# Altium PCB ERN_MainPowerV2.PcbDoc
Units mil, origin at the board's own origin, x right, y up, seen from the top; angles counter-clockwise.
Board outline 4800 x 4030 mil, 2 copper layers (Top Layer, Bottom Layer); 68 components, 43 nets, 190 pads, 31 vias.
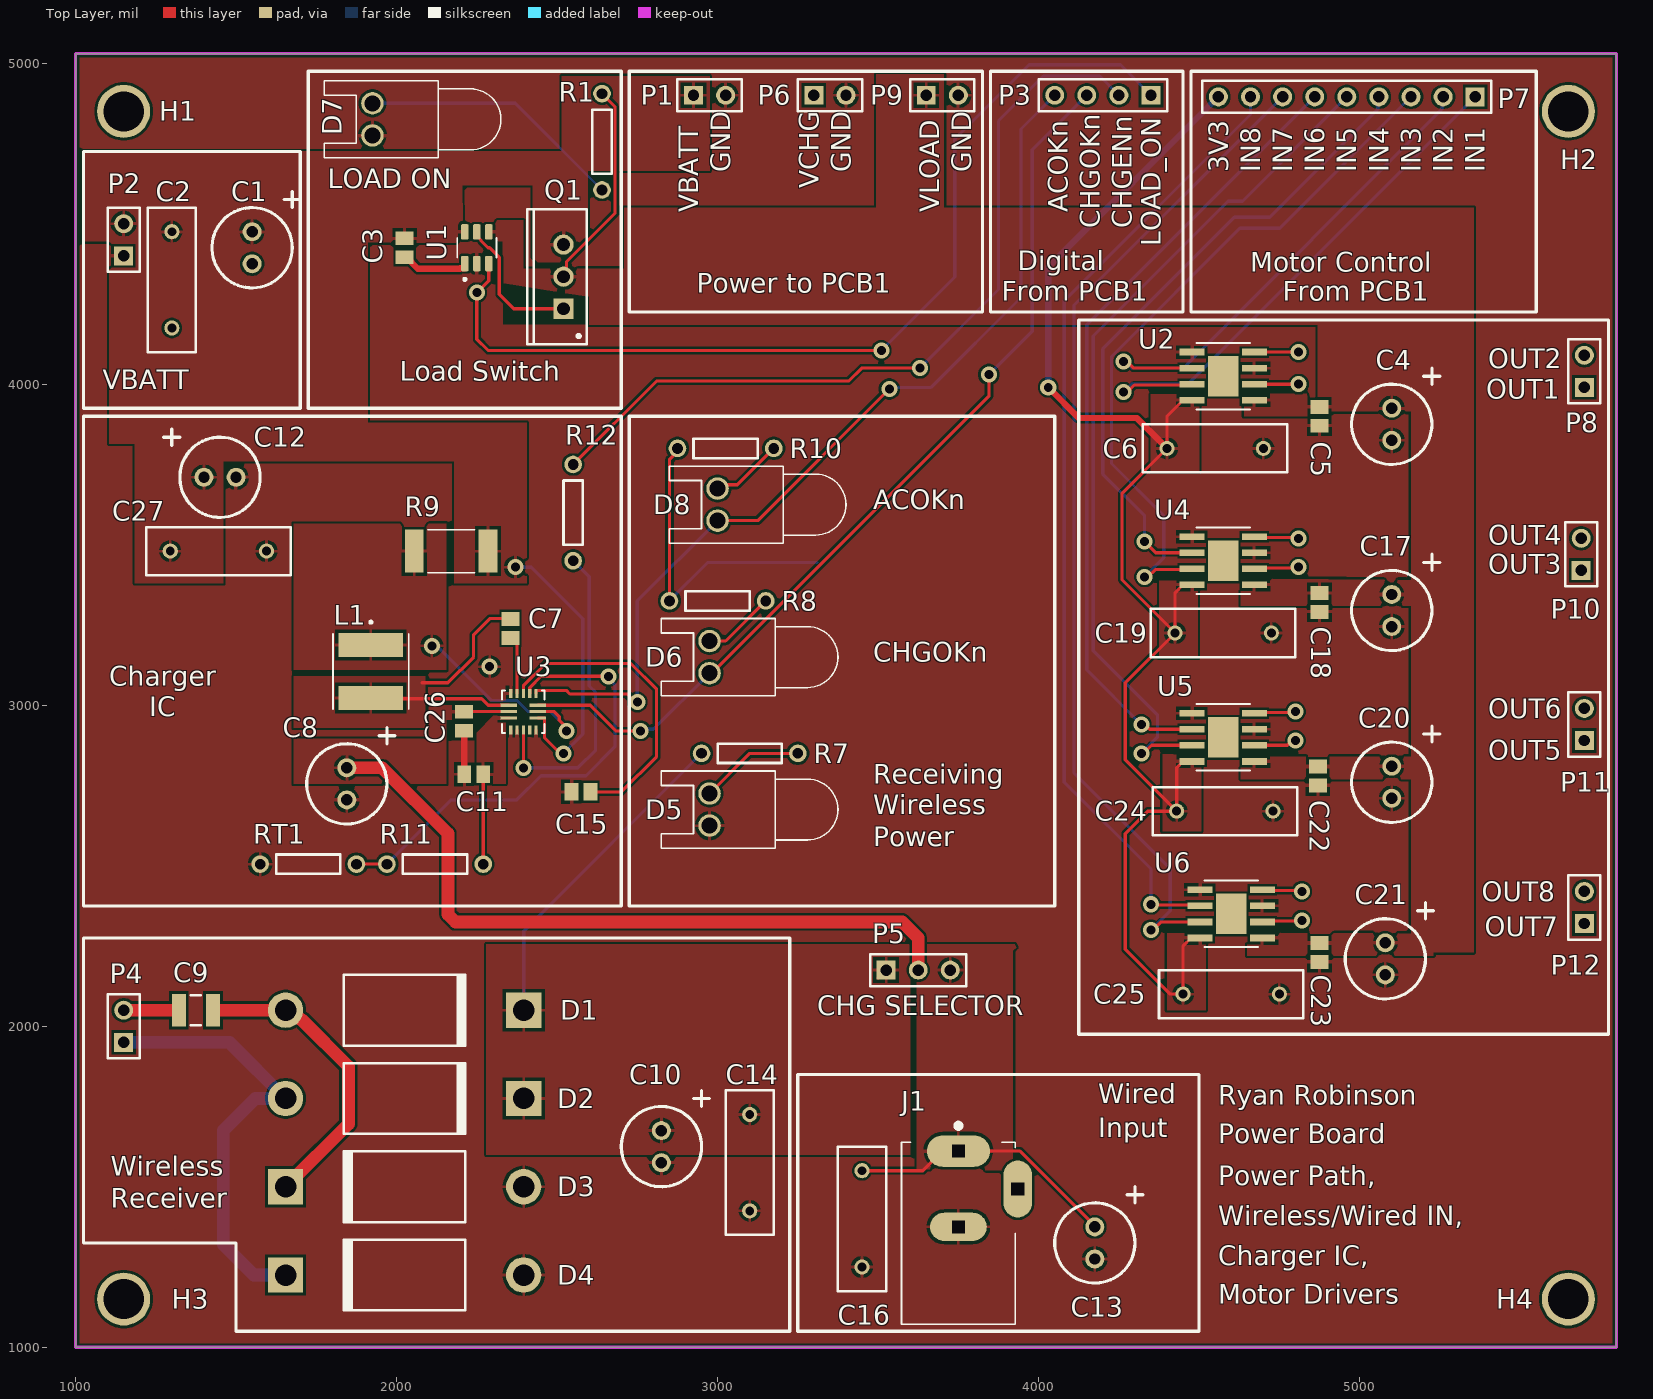
[diagram p0: Top Layer view]
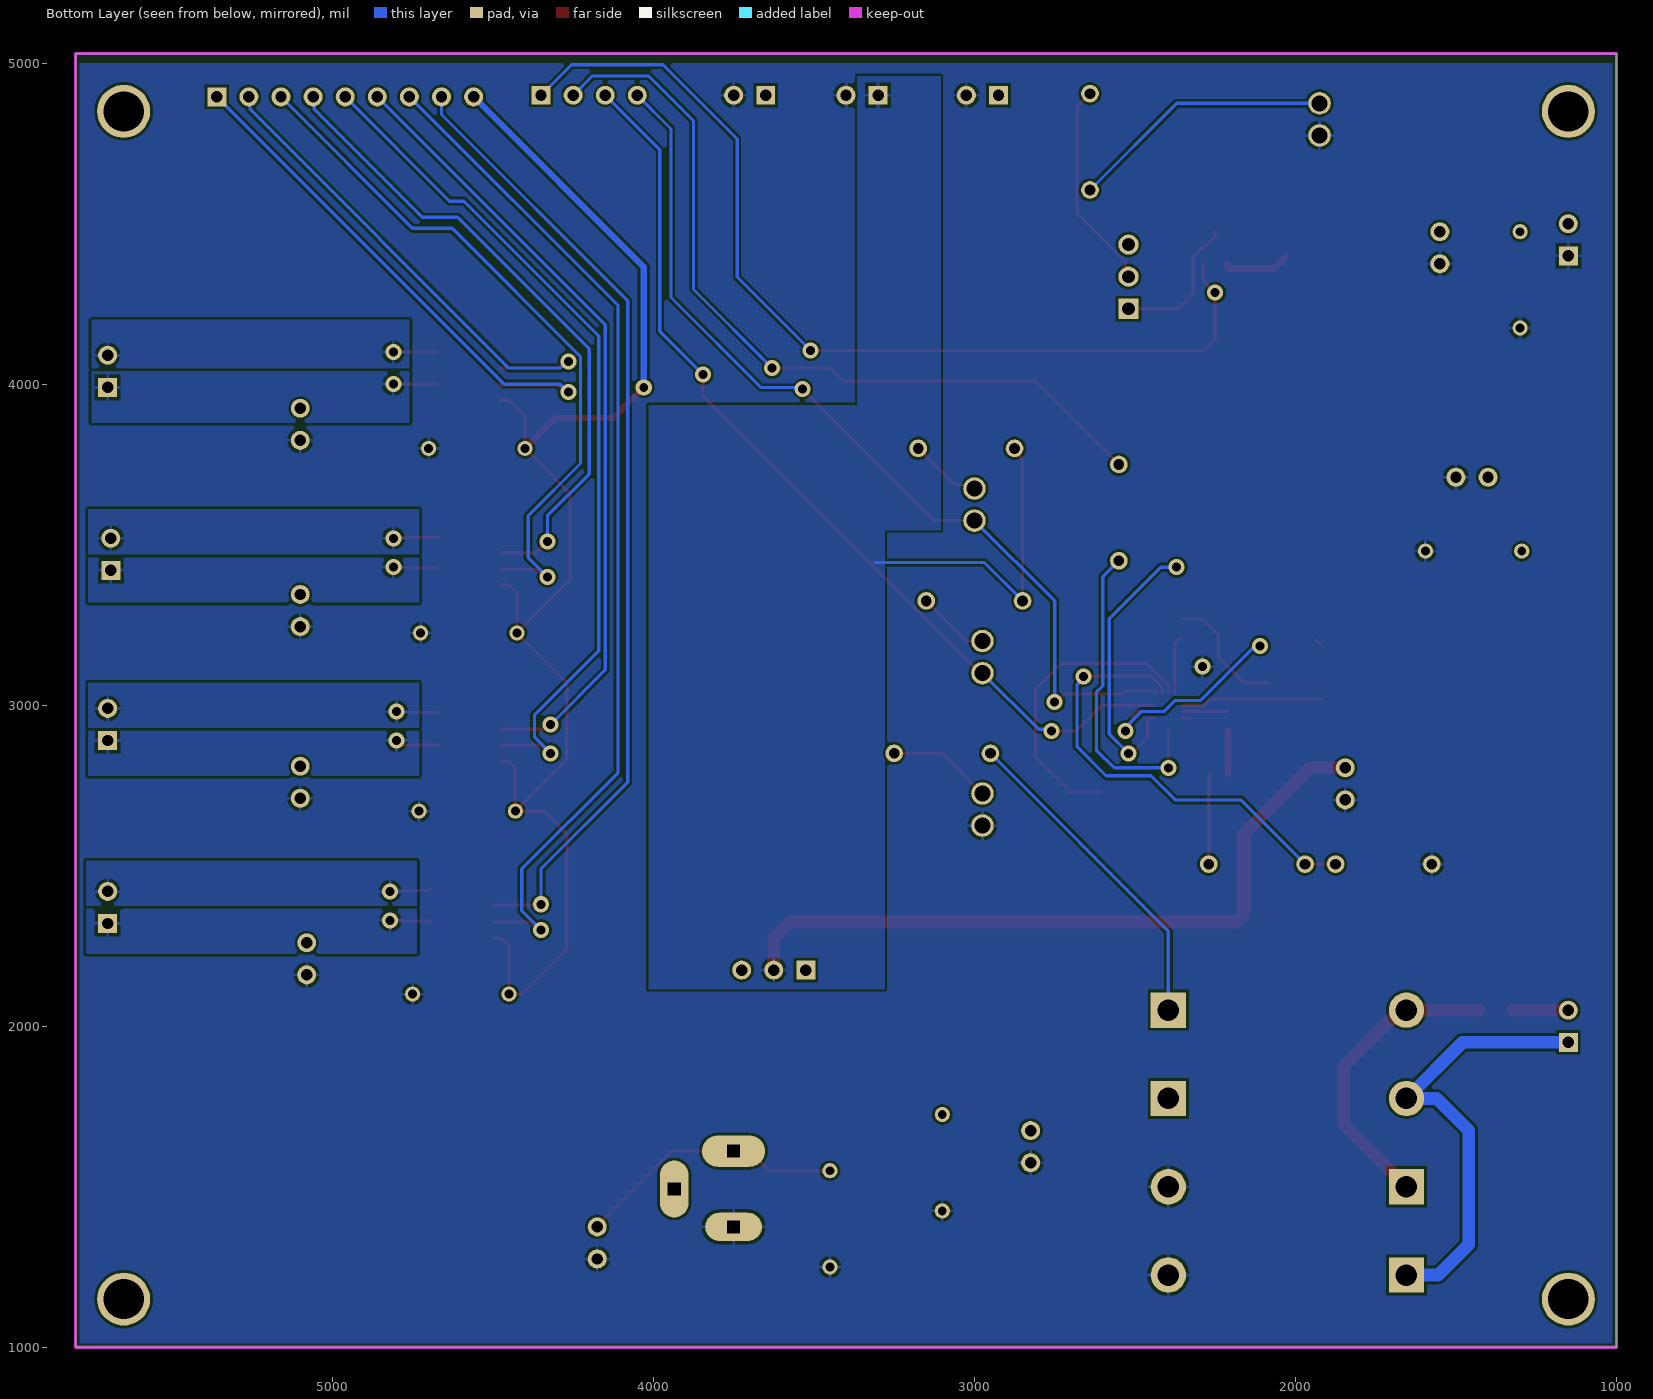
[diagram p1: Bottom Layer view, seen from below]

## Layer stack, top to bottom
Top Solder: solder mask 0.4, Solder Resist, Dk 3.5
Top Layer: signal copper 1.4
Dielectric 1: dielectric 12.6, FR-4, Dk 4.8
Bottom Layer: signal copper 1.4
Bottom Solder: solder mask 0.4, Solder Resist, Dk 3.5

## Board outline
1000,1000 1000,5030 5800,5030 5800,1000

## Design rules (kind name [scope] priority, off if disabled: settings)
Clearance [All] p1: gap=8 ignorepadtopadclearanceinfootprint=FALSE
MinimumSolderMaskSliver [All] p1: minsoldermaskwidth=4
PolygonConnect [All] p1: connectstyle=Relief reliefconductorwidth=10 reliefentries=4 polygonreliefangle="90 Angle" airgapwidth=10
RoutingVias [All] p1: holewidth=28 width=50 viastyle="Through Hole" minholewidth=28 minwidth=50 maxholewidth=28 maxwidth=50
SolderMaskExpansion [All] p1: expansion=4 istentingtop=FALSE
SupplyNets "Schematic Supply Nets_3" [InNet('+3V3')] p1: voltage=0.000
SupplyNets "Schematic Supply Nets_2" [InNet('VLOAD')] p2: voltage=0.000
SupplyNets "Schematic Supply Nets_1" [InNet('GND')] p3: voltage=0.000
SupplyNets "Schematic Supply Nets" [InNet('VBATT')] p4: voltage=0.000
Width [All] p1: maxlimit=40 minlimit=10 preferedwidth=10
29 further rules are at their usual default settings.

## Classes and differential pairs
component class ERN_MainPowerV2_2: C7 C8 C9 C10 C11 C12 C13 C14 C15 C16 C26 C27 D1 D2 D3 D4 D5 D6 D8 J1 L1 P4 P5 R7 R8 R9 R10 R11 R12 RT1 U3
component class ERN_MainPowerV2: C1 C2 C3 C4 C5 C6 C17 C18 C19 C20 C21 C22 C23 C24 C25 D7 H1 H2 H3 H4 P1 P2 P3 P6 P7 P8 P9 P10 P11 P12 Q1 R1 U1 U2 U4 U5 U6

## Components (designator, comment, footprint, x,y, rotation, side; value= is the part's Value field where it differs from the comment)
C1 "Cap Pol1" Cap_47uF_100uF 1550,4425 r270 top value=100uF
C2 "Cap" RAD-0.3 1300,4325 r90 top value=0.1uF
C3 "Cap" C0805 2025,4425 r90 top value=0.1uF
C4 "Cap Pol1" Cap_47uF_100uF 5100,3875 r270 top value=100uF
C5 "Cap" C0805 4875,3900 r90 top value=0.1uF
C6 "Cap" RAD-0.3 4550,3800 r180 top value=0.1uF
C7 "Cap" C0805 2355,3239.53 r90 top value=0.1uF
C8 "Cap Pol1" Cap_47uF_100uF 1845,2755 r270 top value=22uF
C9 "Cap" C1210 1375,2050 r0 top value=94nF
C10 "Cap Pol1" Cap_47uF_100uF 2825,1625 r270 top value=10uF
C11 "Cap" C0805 2240.47,2785 r0 top value=1uF
C12 "Cap Pol1" Cap_47uF_100uF 1450,3710 r0 top value=22uF
C13 "Cap Pol1" Cap_47uF_100uF 4175,1325 r270 top value=100uF
C14 "Cap" RAD-0.3 3100,1575 r270 top value=0.1uF
C15 "Cap" C0805 2574.53,2730 r180 top value=1uF
C16 "Cap" RAD-0.3 3450,1400 r270 top value=0.1uF
C17 "Cap Pol1" Cap_47uF_100uF 5100,3295 r270 top value=100uF
C18 "Cap" C0805 4875,3320.47 r90 top value=0.1uF
C19 "Cap" RAD-0.3 4575,3225 r180 top value=0.1uF
C20 "Cap Pol1" Cap_47uF_100uF 5100,2760 r270 top value=100uF
C21 "Cap Pol1" Cap_47uF_100uF 5080,2210 r270 top value=100uF
C22 "Cap" C0805 4870,2779.53 r90 top value=0.1uF
C23 "Cap" C0805 4875,2229.53 r90 top value=0.1uF
C24 "Cap" RAD-0.3 4580,2670 r180 top value=0.1uF
C25 "Cap" RAD-0.3 4600,2100 r180 top value=0.1uF
C26 "Cap" C0805 2210,2950 r90 top value=0.1uF
C27 "Cap" rad-0.3 1445,3480 r0 top value=0.1uF
D1 "Diode 1N5406" DO-201AD 2025,2050 r0 top
D2 "Diode 1N5406" DO-201AD 2025,1775 r0 top
D3 "Diode 1N5406" DO-201AD 2025,1500 r180 top
D4 "Diode 1N5406" DO-201AD 2025,1225 r180 top
D5 "LED2" led-0 2975,2675 r90 top
D6 "LED2" led-0 2975,3150 r90 top
D7 "LED2" led-0 1925,4825 r90 top
D8 "LED2" led-0 3000,3625 r90 top
H1 "Hole 125mil" "Hole 125mil" 1150,4850 r0 top
H2 "Hole 125mil" "Hole 125mil" 5650,4850 r0 top
H3 "Hole 125mil" "Hole 125mil" 1150,1150 r0 top
H4 "Hole 125mil" "Hole 125mil" 5650,1150 r0 top
J1 "PJ-002BH" CUI_PJ-002BH 3750,1611.22 r270 top
L1 "6.8uH" IND_VLS6045EX-6R8M 1920,3105 r270 top
P1 "Header 2" HDR1X2 2925,4900 r0 top
P2 "Header 2" HDR1X2 1150,4400 r90 top
P3 "Header 4" HDR1X4 4350,4900 r180 top
P4 "Header 2" HDR1X2 1150,1950 r90 top
P5 "Header 3" HDR1X3 3525,2175 r0 top
P6 "Header 2" HDR1X2 3300,4900 r0 top
P7 "Header 9" HDR1X9 5360,4895 r180 top
P8 "Header 2" HDR1X2 5700,3990 r90 top
P9 "Header 2" HDR1X2 3650,4900 r0 top
P10 "Header 2" HDR1X2 5690,3420 r90 top
P11 "Header 2" HDR1X2 5700,2890 r90 top
P12 "Header 2" HDR1X2 5700,2320 r90 top
Q1 "NMOS-2" TO-220AB 2520,4335 r90 top
R1 "Res1" AXIAL-0.3 2640,4755 r270 top value=1k
R7 "Res1" AXIAL-0.3 3100,2850 r180 top value=1k
R8 "Res1" AXIAL-0.3 3000,3325 r180 top value=1k
R9 "Res1" RESC6432X90N 2170,3480 r0 top value=25m
R10 "Res1" AXIAL-0.3 3025,3800 r180 top value=1k
R11 "Res1" AXIAL-0.3 2120,2505 r180 top value=1k
R12 "Res1" AXIAL-0.3 2550,3600 r90 top value=100k
RT1 "Res Thermal" AXIAL-0.3 1725,2505 r180 top
U1 "LM74700QDBVRQ1" SOT95P280X145-6N 2250,4425 r90 top
U2 "TB67H450AFNG,EL" P-HSOP8-0405-1.27-002_TOS 4575,4025 r0 top
U3 "MP2615CGQ-Z" QFN-16_3MM×3MM_MNP_MPS 2395,2980 r0 top
U4 "TB67H450AFNG,EL" P-HSOP8-0405-1.27-002_TOS 4575,3450 r0 top
U5 "TB67H450AFNG,EL" P-HSOP8-0405-1.27-002_TOS 4575,2900 r0 top
U6 "TB67H450AFNG,EL" P-HSOP8-0405-1.27-002_TOS 4600,2350 r0 top

## Footprints (in the part's own frame and the unit in brackets; to place one, negate y for a bottom-side part, rotate by r counter-clockwise, add the part's x,y. Pads: shape width x height; smd on the part's side, far side on the other; paste and mask are expansions set on the pad)
AXIAL-0.3 [mm] "Axial Device, Thru-Hole; 2 Leads; 0.3 in Pin Spacing"
  round 1.4 hole 0.85: 1(-3.81,0) 2(3.81,0)
  silkscreen extent -2.54,-0.76 2.54,0.76
C0805 [mm] "Chip Capacitor, Body 2.0x1.3mm, IPC High Density"
  rect 1.1x1.4 smd: 1(-0.75,0) 2(0.75,0)
  body extent -1.1,-0.72 1.1,0.72, height 1.4
C1210 [mm] "Chip Capacitor, Body 3.2x2.5mm, IPC High Density"
  rect 1.1x2.6 smd: 1(-1.35,0) 2(1.35,0)
  silkscreen extent -0.4,-1.2 0.4,1.2, body extent -1.7,-1.35 1.7,1.35, height 1.3
Cap_47uF_100uF [mm] "47uF or 100uF Electrolytic Capacitor"
  round 1.5 hole 0.9: 1(-1.27,0) 2(1.27,0)
  silkscreen extent -4.45,-3.17 3.17,3.81
CUI_PJ-002BH [mm]
  oval 2.5x5 hole 1 square: 1(0,0)
  oval 2.25x4.5 hole 1 square: 2(6,0)
  oval 4.5x2.25 hole 1 square: 3(3,4.7)
  silkscreen extent -2.2,-4.5 13.7,4.5, body extent -0.64,-4.7 13.76,4.7, height 4.5
DO-201AD [mm] "Diode, Axial; Body 9.5 x 5.6 mm (LxDia. max), Lead Dia. 1.32 mm (max)"
  round 2.8 hole 1.7: 1(-9.42,0)
  rect 2.8x2.8 hole 1.7: 2(9.42,0)
  silkscreen extent -4.8,-2.8 4.9,2.8
HDR1X2 [mm] "Connector; Header; 2 Position"
  rect 1.5x1.5 hole 0.9: 1(0,0)
  round 1.5 hole 0.9: 2(2.54,0)
  silkscreen extent -1.27,-1.27 3.81,1.27
HDR1X3 [mm] "Connector; Header; 3 Position"
  rect 1.5x1.5 hole 0.9: 1(0,0)
  round 1.5 hole 0.9: 2(2.54,0) 3(5.08,0)
  silkscreen extent -1.27,-1.27 6.35,1.27
HDR1X4 [mm] "Connector; Header; 4 Position"
  rect 1.5x1.5 hole 0.9: 1(0,0)
  round 1.5 hole 0.9: 2(2.54,0) 3(5.08,0) 4(7.62,0)
  silkscreen extent -1.27,-1.27 8.89,1.27
HDR1X9 [mm] "Connector; Header; 9 Position"
  rect 1.5x1.5 hole 0.9: 1(0,0)
  round 1.5 hole 0.9: 2(2.54,0) 3(5.08,0) 4(7.62,0) 5(10.16,0) 6(12.7,0) 7(15.24,0) 8(17.78,0) 9(20.32,0)
  silkscreen extent -1.27,-1.27 21.59,1.27
"Hole 125mil" [mil]
  round 165 hole 125: 1(0,0)
IND_VLS6045EX-6R8M [mm]
  rect 1.9x5.1 smd: 1(-2.1,0) 2(2.1,0)
  silkscreen extent -4,-3 3,3, body extent -3,-3 3,3, height 4.5
led-0 [mil] "LED; 2 Leads"
  round 70 hole 50: 1(50,0) 2(-50,0)
  silkscreen extent -120,-400 120,150
P-HSOP8-0405-1.27-002_TOS [mil]
  rect 77.56x20.97 smd paste+0 mask+0: 1(-97,75) 2(-97,25) 3(-97,-25) 4(-97,-75) 5(97,-75) 6(97,-25) 7(97,25) 8(97,75)
  rect 94x126 smd paste-62.5 mask+0: EPAD(0,0)
  silkscreen extent -84,-104 84,104, body extent -122,-99 122,99, height 67
QFN-16_3MM×3MM_MNP_MPS [mil]
  rect 51x10 smd paste+0 mask+0: 1(-45.28,19.69) 2(-45.28,0) 3(-45.28,-19.69) 9(45.28,-19.69) 10(45.28,0) 11(45.28,19.69)
  rect 10x28 smd paste+0 mask+0: 4(-39.38,-57.09) 5(-19.69,-57.09) 6(0,-57.09) 7(19.69,-57.09) 8(39.38,-57.09) 12(39.38,57.09) 13(19.69,57.09) 14(0,57.09) 15(-19.69,57.09) 16(-39.38,57.09)
  silkscreen extent -66,-66 66,66, body extent -61,-61 61,61, height 37
RAD-0.3 [mm] "Radial Cap, Thru-Hole; 2 Leads; 0.3 in Pin Spacing"
  round 1.2 hole 0.7: 1(-3.81,0) 2(3.81,0)
  silkscreen extent -5.71,-1.91 5.71,1.91
rad-0.3 [mm] "Radial Cap, Thru-Hole; 2 Leads; 0.3 in Pin Spacing"
  round 1.2 hole 0.7: 1(-3.81,0) 2(3.81,0)
  silkscreen extent -5.71,-1.91 5.71,1.91
RESC6432X90N [mm]
  rect 1.49x3.42 smd paste+0 mask+0.102: 1(-2.914,0) 2(2.914,0)
  silkscreen extent -1.85,-1.7 1.85,1.7, body extent -3.2,-1.6 3.2,1.6, height 0.9
SOT95P280X145-6N [mm]
  rrect25% 1.21x0.58 smd: 1(-1.255,0.95) 2(-1.255,0) 3(-1.255,-0.95) 4(1.255,-0.95) 5(1.255,0) 6(1.255,0.95)
  silkscreen extent -2.6,-1.56 0.8,1.56, body extent -1.4,-1.45 1.4,1.45, height 1.45
TO-220AB [mm] "TO, Thru-Hole, Vertical, Heatsink Mounted; 3 In-Line Leads; Pitch 2.54 mm"
  rect 1.6x1.6 hole 1: 1(-2.54,0)
  round 1.6 hole 1: 2(0,0) 3(2.54,0)
  silkscreen extent -5.35,-1.85 5.35,2.85, body extent -5.4,-1.9 5.4,2.9, height 19.3

## Part data
C1 C4 C8 C10 C12 C13 C17 C20 C21: "Polarized Capacitor (Radial)", LatestRevisionDate=17-Jul-2002, LatestRevisionNote="Re-released for DXP Platform.", PackageDescription="Polarized Capacitor (Radial); 2 Leads", PackageReference=RB7.6-15, Published=8-Jun-2000, Publisher="Altium Limited"
C2 C3 C5 C6 C7 C9 C11 C14 C15 C16 C18 C19 C22 C23 C24 C25 C26 C27: "Capacitor", LatestRevisionDate=17-Jul-2002, LatestRevisionNote="Re-released for DXP Platform.", PackageDescription="Radial Cap, Thru-Hole; 2 Leads; 0.3 in Pin Spacing", PackageReference=RAD-0.3, Published=8-Jun-2000, Publisher="Altium Limited"
D1 D2 D3 D4: "3 Amp General Purpose Rectifier", ComponentLink1Description="Manufacturer Link", ComponentLink1URL=http://www.fairchildsemi.com/, ComponentLink2Description=Datasheet, ComponentLink2URL=http://www.fairchildsemi.com/ds/1N%2F1N5400.pdf, DatasheetVersion=1998, LatestRevisionDate=17-Jul-2002, LatestRevisionNote="Re-released for DXP Platform.", PackageDescription="Diode, Axial; Body 9.5 x 5.6 mm (LxDia. max), Lead Dia. 1.32 mm (max)", PackageReference=DO-201AD, PackageVersion=Aug-1999, Published=8-Jun-2000, Publisher="Altium Limited"
D5 D6 D7 D8: "Typical RED, GREEN, YELLOW, AMBER GaAs LED", LatestRevisionDate=17-Jul-2002, LatestRevisionNote="Re-released for DXP Platform.", PackageDescription="SM LED; 2 Flat Leads", PackageReference=3.2X1.6X1.1, PackageVersion=Feb-2002, Published=8-Jun-2000, Publisher="Altium Limited"
J1: "2.5 x 6.5 mm, 5.0 A, Horizontal, Through Hole, Dc Power Jack Connector", Package=None, Check_prices=https://www.snapeda.com/parts/PJ-002BH/Same+Sky/view-part/?ref=eda, MF="Same Sky", MP=PJ-002BH, SnapEDA_Link=https://www.snapeda.com/parts/PJ-002BH/Same+Sky/view-part/?ref=snap
L1: library part 2111-V-RC, "Inductor 68uH", Manufacturer_Name="Bourns Electronics", Copyright="Copyright (C) 2026 Ultra Librarian. All rights reserved.", Manufacturer_Part_Number=2111-V-RC
P1 P2 P4 P6 P8 P9 P10 P11 P12: "Header, 2-Pin", LatestRevisionDate=17-Jul-2002, LatestRevisionNote="Re-released for DXP Platform.", Publisher="Altium Limited"
P3: "Header, 4-Pin", LatestRevisionDate=17-Jul-2002, LatestRevisionNote="Re-released for DXP Platform.", Publisher="Altium Limited"
P5: "Header, 3-Pin", LatestRevisionDate=17-Jul-2002, LatestRevisionNote="Re-released for DXP Platform.", Publisher="Altium Limited"
P7: "Header, 9-Pin", LatestRevisionDate=17-Jul-2002, LatestRevisionNote="Re-released for DXP Platform.", Publisher="Altium Limited"
Q1: "N-Channel Power MOSFET", ComponentLink1Description="Manufacturer Link", ComponentLink1URL=http://www.irf.com/, DatasheetVersion=PD-9.814, LatestRevisionDate=17-Jul-2002, LatestRevisionNote="Re-released for DXP Platform.", Note="Pin 2 is electrically connected to pin 4.", PackageDescription="TO, Thru-Hole, Vertical, Heatsink Mounted; 3 In-Line Leads; Pitch 2.54 mm", PackageReference=TO-220AB, PackageVersion=Feb-1997, Published=8-Jun-2000, Publisher="Altium Limited"
R1 R7 R8 R9 R10 R11 R12: "Resistor", LatestRevisionDate=17-Jul-2002, LatestRevisionNote="Re-released for DXP Platform.", PackageDescription="Axial Device, Thru-Hole; 2 Leads; 0.3 in Pin Spacing", PackageReference=AXIAL-0.3, Published=8-Jun-2000, Publisher="Altium Limited"
RT1: "Thermistor", Code_IPC=RESC2012, LatestRevisionDate=29-May-2009, LatestRevisionNote="IPC-7351 Footprint Added.", PackageDescription="Chip Resistor 0805 Case Size", PackageReference=6-0805, PackageVersion=Mar-2003, Published=24-Mar-1999, Publisher="Altium Limited"
U1: "3.2-V to 65-V, 80-uA IQ automotive ideal diode controller", Package="SOT-23-6 Texas Instruments", Check_prices=https://www.snapeda.com/parts/LM74700QDBVRQ1/Texas+Instruments/view-part/?ref=eda, MF="Texas Instruments", MP=LM74700QDBVRQ1, SnapEDA_Link=https://www.snapeda.com/parts/LM74700QDBVRQ1/Texas+Instruments/view-part/?ref=snap
U2 U4 U5 U6: "Toshiba Motor Driver IC", Manufacturer_Name="Toshiba Electronic Devices & Storage Corp.", Copyright="Copyright (C) 2025 Ultra Librarian. All rights reserved.", Manufacturer_Part_Number=TB67H450AFNG,EL, RefDes=RefDes, Type=Type
U3: "2.1A 1- or 2-Cell Li-ion Battery Charger with 25mohm Rsns", Manufacturer_Name="Monolithic Power Systems", Copyright="Copyright (C) 2026 Ultra Librarian. All rights reserved.", Manufacturer_Part_Number=MP2615CGQ-Z, RefDes=RefDes, Type=Type

## Via types
v1: diameter 50, hole 28, Top Layer to Bottom Layer, 31 vias

## Nets (pads, with @x,y where several pads share a name; then routed paths per layer and width w, separated by ;. In a path a pad name is that pad's centre, name@x,y a point inside that pad or via, vN(x,y) a via of type N, cw(c..) or ccw(c..) an arc to the next point about the centre after c; other vN are vias at no path point)
+3V3: C6.2 C19.2 C24.2 C25.2 P7.9 U2.4 U4.4 U5.4 U6.4 | length 4539.4
  Top Layer w10: U5.4 4449.7,2825 4430,2805.3 C24.2 ; U4.4 4449.7,3375 4425,3350.3 C19.2 ; U2.4 4449.7,3950 4400,3900.3 C6.2 4260,3660 4260,3390 C19.2 ; U6.4 4474.7,2275 4450,2250.3 C25.2 4410,2100 4270,2240 4270,2600 4340,2670 C24.2 ; C19.2 4270,3070 4270,2830 C24.2
  Top Layer w20: v1(4030,3990) 4125.26,3894.74 4305.26,3894.74 C6.2
  Bottom Layer w20: v1(4030,3990) 4030,4365 P7.9
A\C\O\K\: D8.2 P3.4 U3.12 | length 2914.5
  Top Layer w10: U3.12 2434.38,3046.09 2529.04,3046.09 2540.13,3035 2718.43,3035 2743.43,3010 v1(2750,3010) ; D8.2 3125,3575 v1(3535,3985)
  Bottom Layer w10: v1(2750,3010) 2750,3325 D8.2 ; v1(3535,3985) 3540,3990 3665,3990 3945,4270 3945,4795 P3.4
C\H\G\_\E\N\: P3.2 R12.2 | length 2533.6
  Top Layer w10: R12.2 2810,4010 3408.43,4010 3448.43,4050 v1(3630,4050)
  Bottom Layer w10: v1(3630,4050) 3875,4295 3875,4820 4015,4960 4190,4960 P3.2
C\H\G\O\K\: D6.2 P3.3 U3.11 | length 2933.3
  Top Layer w10: U3.11 2603.12,2999.69 2682.81,2920 v1(2760,2920) ; D6.2 2982.36,3100 3845,3962.64 v1(3845,4030)
  Bottom Layer w10: v1(2760,2920) 2765,2925 2800,2925 D6.2 ; v1(3845,4030) 3980,4165 3980,4730 P3.3
CHG_HV: C8.1 C26.2 P5.2 P6.1 R8.2 R10.2 U3.2 | length 3381.9
  Top Layer w10: C26.2 2210.47,2980 U3.2 ; R8.2 2850,3764.81 2875,3789.81 R10.2
  Top Layer w40: C8.1 1955,2805 2160,2600 2160,2348.43 2183.43,2325 3575,2325 3625,2275 P5.2
  Bottom Layer w10: R8.2 2970,3445 3310,3445
GND: C1.2 C2.1 C4.2 C5.1 C6.1 C8.2 C10.2 C11.1 C12.2 C13.2 C14.2 C15.2 C16.2 C17.2 C18.1 C19.1 C20.2 C21.2 C22.1 C23.1 C24.1 C25.1 C26.1 C27.2 D3.1 D4.1 D5.2 D7.2 J1.2 P1.2 P2.1 P6.2 P9.2 RT1.2 U1.2 U2.1 U2.7 U3.4 U3.5 U3.8 U3.16 U4.1 U4.7 U5.1 U5.7 U6.1 U6.7 | length 135.9
  Top Layer w20: C26.1 2210.47,2920 2210.47,2785.47 C11.1
  other v1: 2290,3120
IN1: P7.1 U2.3 | length 1699.4
  Top Layer w10: v1(4265,3975) 4275.82,3975 4298.32,3997.5 4475.5,3997.5 U2.3
  Bottom Layer w10: v1(4265,3975) 4290,4000 4465,4000 P7.1
IN2: P7.2 U2.2 | length 1595.1
  Top Layer w10: v1(4265,4070) 4275.82,4070 4295.82,4050 U2.2
  Bottom Layer w10: v1(4265,4070) 4270.86,4070 4290.86,4050 4450,4050 5256.33,4856.33 5256.33,4891.33 P7.2
IN3: P7.3 U4.3 | length 2204.7
  Top Layer w10: v1(4330,3400) 4340.82,3400 4363.32,3422.5 4475.5,3422.5 U4.3
  Bottom Layer w10: v1(4330,3400) 4390,3460 4390,3590 4227,3753 4227,4085.74 4626.94,4485.68 4750.68,4485.68 P7.3
IN4: P7.4 U4.2 | length 2022
  Top Layer w10: v1(4330,3510) 4365,3475 U4.2
  Bottom Layer w10: v1(4330,3510) 4330,3590 4200,3720 4200,4110 4610,4520 4720,4520 5056.33,4856.33 5056.33,4891.33 P7.4
IN5: P7.5 U5.3 | length 2670.5
  Top Layer w10: v1(4320,2850) 4326.57,2850 4351.57,2875 U5.3
  Bottom Layer w10: v1(4320,2850) 4370,2900 4370,2970 4170,3170 4170,4150 4590,4570 4635,4570 P7.5
IN6: P7.6 U5.2 | length 2483.7
  Top Layer w10: v1(4320,2940) 4330.82,2940 4345.82,2925 U5.2
  Bottom Layer w10: v1(4320,2940) 4150,3110 4150,4185 P7.6
IN7: P7.7 U6.3 | length 3176.7
  Top Layer w10: v1(4350,2300) 4356.57,2300 4381.57,2325 U6.3
  Bottom Layer w10: v1(4350,2300) 4410,2360 4410,2490 4110,2790 4110,4245 P7.7
IN8: P7.8 U6.2 | length 3022.2
  Top Layer w10: v1(4350,2380) 4352.5,2377.5 4500.5,2377.5 U6.2
  Bottom Layer w10: v1(4350,2380) 4350,2490 4080,2760 4080,4260 4660,4840 P7.8
LOAD_ON: P3.1 U1.3 | length 3025.5
  Top Layer w10: U1.3 2287.4,4322.4 v1(2250,4285) 2250,4140 2285,4105 v1(3510,4105)
  Bottom Layer w10: v1(3510,4105) 3738.83,4333.83 3738.83,4763.83 3970,4995 4255,4995 P3.1
NetC3_1: C3.1 U1.1 | length 216
  Top Layer w10: C3.1 C3.1@2030.91,4395.47
  Top Layer w20: C3.1@2030.91,4395.47 2066.38,4360 2197.01,4360 2198.78,4361.77 2211.18,4361.77 2212.6,4363.19 U1.1
NetC7_1: C7.1 U3.15 | length 183.5
  Top Layer w10: C7.1 2358.66,3210 2375.31,3193.35 U3.15
NetC7_2: C7.2 L1.2 U3.1 | length 838.3
  Top Layer w10: L1.2 1922.32,3020 2265,3020 2285.31,2999.69 U3.1 ; 2080,3070 2160,3070 2240,3150 2240,3220 2290,3270 2354.06,3270 C7.2
NetC9_1: C9.1 P4.2 | length 171.9
  Top Layer w40: P4.2 C9.1
NetC9_2: C9.2 D1.1 D3.2 | length 950.5
  Top Layer w40: C9.2 D1.1 1673.14,2050 1704.11,2019.03 1705.97,2019.03 1850,1875 1850,1695.87 D3.2
NetC11_2: C11.2 R11.1 U3.3 | length 300.5
  Top Layer w10: R11.1 C11.2 ; U3.3@2329.22,2960.31 U3.3
NetC15_1: C15.1 U3.14 | length 961.9
  Top Layer w10: U3.14 2395,3060.55 2462.45,3128 2463,3128 2465,3130 2730,3130 2810,3050 2810,2840 2700,2730 C15.1
NetD2_1: D2.1 D4.2 P4.1 | length 1400.7
  Bottom Layer w40: P4.1 1479.13,1950 D2.1 1560,1775 1460,1675 1460,1320 1555,1225 D4.2
NetD5_1: D5.1 R7.1 | length 326.8
  Top Layer w10: D5.1 3100,2850 R7.1
NetD6_1: D6.1 R8.1 | length 226.8
  Top Layer w10: D6.1 3025,3200 R8.1
NetD7_1: D7.1 R1.2 | length 826.8
  Bottom Layer w10: D7.1 2370,4875 R1.2
NetD8_1: D8.1 R10.1 | length 226.8
  Top Layer w10: D8.1 3011.48,3686.48 3061.48,3686.48 R10.1
NetL1_1: L1.1 R9.1 U3.10 | length 669.1
  Top Layer w10: L1.1 L1.1@1935,3202.68 ; U3.10 2491.36,2980 2506.85,2964.51 2506.85,2953.42 2530,2930.28 v1(2530,2920)
  Bottom Layer w10: v1@2125,3185 2295,3015 2375,3015 2410,2980 2480.28,2980 2530,2930.28 v1(2530,2920)
  other v1: 2110,3185
NetQ1_1: Q1.1 U1.5 | length 467.1
  Top Layer w10: U1.5 2250,4462.01 2262.98,4449.02 2262.98,4446.88 2284.86,4425 2289.94,4425 2320,4394.94 2320,4280 2365,4235 Q1.1
  Bottom Layer w10: Q1.1@2504.36,4250.64 Q1.1
NetR11_2: R11.2 RT1.1 U3.13 | length 1462.1
  Top Layer w10: RT1.1 R11.2 ; U3.13 2414.69,3054.78 2449.91,3090 v1(2660,3090)
  Bottom Layer w10: R11.2 2170,2705 2375,2705 2450,2780 2590,2780 2680,2870 2680,3064.14 2660,3084.14 v1(2660,3090)
NetR12_1: R12.1 U3.6 | length 984.7
  Top Layer w10: v1(2395,2805) U3.6
  Bottom Layer w10: v1(2395,2805) 2565,2805 2620,2860 2620,3040 2600,3060 2600,3400 R12.1
OUT1: P8.1 U2.6 | length 138
  Top Layer w10: U2.6 v1(4810,4000)
OUT2: P8.2 U2.8 | length 138
  Top Layer w10: U2.8 v1(4810,4100)
OUT3: P10.1 U4.6 | length 140.1
  Top Layer w10: U4.6 4674.5,3427.5 4807.5,3427.5 v1(4810,3430)
OUT4: P10.2 U4.8 | length 140.1
  Top Layer w10: U4.8 4674.5,3522.5 4807.5,3522.5 v1(4810,3520)
OUT5: P11.1 U5.6 | length 138.4
  Top Layer w10: U5.6 4695,2875 4700,2880 4705,2875 4774.18,2875 4789.18,2890 v1(4800,2890)
OUT6: P11.2 U5.8 | length 130.1
  Top Layer w10: U5.8 4674.5,2977.5 4797.5,2977.5 v1(4800,2980)
OUT7: P12.1 U6.6 | length 125.1
  Top Layer w10: U6.6 4699.5,2327.5 4817.5,2327.5 v1(4820,2330)
OUT8: P12.2 U6.8 | length 125.1
  Top Layer w10: U6.8 4699.5,2422.5 4817.5,2422.5 v1(4820,2420)
VBATT: C1.1 C2.2 C3.2 C12.1 C27.1 P1.1 P2.2 Q1.3 R9.2 U1.6 U3.9 | length 882.8
  Top Layer w10: U3.9 2460.78,2960.31 2460.78,2898.4 2509.18,2850 v1(2520,2850)
  Bottom Layer w10: v1(2370,3430) 2420,3430 2580,3270 2580,2910 v1(2520,2850)
VLOAD: C4.1 C5.2 C17.1 C18.2 C20.1 C21.1 C22.2 C23.2 P9.1 Q1.2 R1.1 U1.4 U2.5 U4.5 U5.5 U6.5 | length 653.3
  Top Layer w10: Q1.2 2529.42,4344.42 2529.42,4381.5 2680.56,4532.63 2680.56,4864.44 R1.1
Wired12V: C13.1 C16.1 J1.1 P5.3 | length 850.2
  Top Layer w10: C16.1 3639.57,1550 3700.79,1611.22 J1.1 3942.24,1611.22 4175,1378.46 C13.1
WirelessRaw: C10.1 C14.1 D1.2 D2.2 P5.1 R7.2 | length 1064.2
  Top Layer w10: P5.1@3500.47,2150.47 P5.1
  Bottom Layer w10: D1.2 2395.87,2295.87 R7.2
pads on no net: H1.1 H2.1 H3.1 H4.1 J1.3 U2.EPAD U3.7 U4.EPAD U5.EPAD U6.EPAD

## Polygon pours and split planes (outlines as drawn)
GND on Top Layer "GND_L01_P046" (solid, pour order 46): 1000,5030 5800,5030 5800,1000 1000,1000
VLOAD on Top Layer "VLOAD_L01_P033" (solid, pour order 33): 4640,3970 4640,3900 4940,3900 4940,3970
+3V3 on Top Layer "+3V3_L01_P032" (solid, pour order 32): 4500,3969.01 4500,3729.01 4350,3729.01 4350,3969.01
+3V3 on Top Layer "+3V3_L01_P031" (solid, pour order 31): 4496.01,3387.6 4496.01,3147.6 4376.01,3147.6 4376.01,3387.6
+3V3 on Top Layer "+3V3_L01_P030" (solid, pour order 30): 4506.01,2847.6 4506.01,2607.6 4386.01,2607.6 4386.01,2847.6
+3V3 on Top Layer "+3V3_L01_P029" (solid, pour order 29): 4520,2290 4520,2050 4400,2050 4400,2290
CHG_HV on Top Layer "CHG_HV_L01_P028" (solid, pour order 28): 2250,3000 2105,3000 2100,2995 2100,2895 1680,2895 1680,2755 2155,2755 2155,2955 2250,2955
VBATT on Top Layer "VBATT_L01_P027" (solid, pour order 27): 1105,4545 1105,3815 1910,3815 1910,4545
VBATT on Top Layer "VBATT_L01_P026" (solid, pour order 26): 2180,3380 2405,3380 2405,3880 1185,3880 1185,3380 1460,3380 1460,3760 2180,3760
WirelessRaw on Top Layer "WIRELESSRAW_L01_P025" (solid, pour order 25): 3595,2255 3600,2250 3600,1600 2280,1600 2280,2255
Wired12V on Top Layer "WIRED12V_L01_P020" (solid, pour order 20): 3620,1555 3620,2255 3930,2255 3935,2250 3920,2235 3920,1550
NetC11_2 on Top Layer "NETC11_2_L01_P018" (solid, pour order 18): 2339.47,2960.31 2339.47,2755 2250,2755 2250,2915 2305,2970 2340,2970 2340,2950
NetC7_2 on Top Layer "NETC7_2_L01_P017" (solid, pour order 17): 1680,3090 1680,2930 2090,2930 2090,3090
NetL1_1 on Top Layer "NETL1_1_L01_P016" (solid, pour order 16): 1680,3565 1680,3110 2155,3110 2155,3565
VLOAD on Top Layer "VLOAD_L01_P015" (solid, pour order 15): 4650,2291.26 4650,2220 5230,2220 5230,2288.74
VLOAD on Top Layer "VLOAD_L01_P014" (solid, pour order 14): 4630.31,2840 4630.31,2770 5206.14,2770 5200.31,2840
VLOAD on Top Layer "VLOAD_L01_P013" (solid, pour order 13): 4630,3395 4630,3310 5205,3310 5205,3390
VBATT on Top Layer "VBATT_L01_P011" (solid, pour order 11): 2975,4960 2975,4665 2515,4665 2515,4960
VLOAD on Top Layer "VLOAD_L01_P010" (solid, pour order 10): 3495,4520 3495,4965 3705,4965 3705,4525 3700,4520
VLOAD on Top Layer "VLOAD_L01_P007" (solid, pour order 7): 5355,4375 4870,4375 4870,3915 5355,3915
VLOAD on Top Layer "VLOAD_L01_P006" (solid, pour order 6): 2270,4510 2395,4510 2395,4360 5270,4360 5270,4185 2330,4185 2330,4445 2270,4445
VBATT on Top Layer "VBATT_L01_P004" (solid, pour order 4): 2185,4725 2595,4725 2595,4380 2440,4380 2425,4395 2425,4620 2185,4620
VBATT on Top Layer "VBATT_L01_P000" (solid, pour order 0): 2207.45,4440.11 2202.46,4725 1025,4725 1025,4445
VLOAD on Top Layer "VLOAD_L01_P009" (solid, pour order 9): 2710,4329.92 2710,4550 5355,4550 5355,4345.42
VLOAD on Top Layer "VLOAD_L01_P008" (solid, pour order 8): 5355,3915 5160,3915 5160,2230 5355,2230
GND on Bottom Layer "GND_L02_P045" (solid, pour order 45): 1000,5000 5800,5000 5800,1000 1000,1000
OUT7 on Bottom Layer "OUT7_L02_P044" (solid, pour order 44): 4736.63,2365.73 4736.63,2225.73 5766.63,2225.73 5766.63,2365.73
OUT8 on Bottom Layer "OUT8_L02_P043" (solid, pour order 43): 4736.63,2515.73 4736.63,2375.73 5766.63,2375.73 5766.63,2515.73
OUT3 on Bottom Layer "OUT3_L02_P042" (solid, pour order 42): 4730,3460 4730,3320 5760,3320 5760,3460
OUT4 on Bottom Layer "OUT4_L02_P041" (solid, pour order 41): 4730,3610 4730,3470 5760,3470 5760,3610
OUT5 on Bottom Layer "OUT5_L02_P040" (solid, pour order 40): 4730,2920 4730,2780 5760,2780 5760,2920
OUT6 on Bottom Layer "OUT6_L02_P036" (solid, pour order 36): 4730,3070 4730,2930 5760,2930 5760,3070
OUT1 on Bottom Layer "OUT1_L02_P034" (solid, pour order 34): 4760,4040 4760,3880 5750,3880 5750,4040
OUT2 on Bottom Layer "OUT2_L02_P022" (solid, pour order 22): 4760,4200 4760,4050 5750,4050 5750,4200
CHG_HV on Bottom Layer "CHG_HV_L02_P021" (solid, pour order 21): 3105,4960 3105,3545 3630,3545 3630,3930 3365,3930 3365,4960
CHG_HV on Bottom Layer "CHG_HV_L02_P005" (solid, pour order 5): 3280,2115 4015,2115 4015,3935 3280,3935

## Keep-outs
Keep-Out Layer:
  the board outline again, w10

## Other copper
Top Layer:
  pour cut-out: 2330,4315 2600,4272.06 2600,4185 2330,4185

## Silkscreen, mask and mechanical layers (free items; w line width, h text height)
Top Overlay:
  lines w10: 1025,1325 1025,1581.25 1025,2093.75 1025,2275 3225,2275 3225,1050 1500,1050 1500,1325 1025,1325 ; 1025,2375 1025,2746.88 1025,3509.38 1025,3900 1175,3900 2700,3900 2700,2375 1025,2375 ; 1025,3925 1025,4725 1700,4725 1700,3925 1025,3925 ; 1725,3925 2700,3925 2700,4975 2450,4975 2200,4975 1725,4975 1725,3925 ; 2725,2375 2725,3900 4050,3900 4050,2375 2725,2375 ; 2725,4225 2725,4975 3825,4975 3825,4225 2725,4225 ; 3250,1050 3250,1075 3250,1850 4500,1850 4500,1050 3250,1050 ; 3850,4225 4450,4225 4450,4975 3850,4975 3850,4225 ; 4125,1975 4125,4200 4250,4200 5775,4200 5775,1975 4125,1975 ; 4475,4225 5550,4225 5550,4975 4475,4975 4475,4225
  text "GND" at 3040,4660 h60 r90
  text "GND" at 3415,4660 h60 r90
  text "GND" at 3790,4660 h60 r90
  text "3V3" at 4590,4660 h60 r90
  text "IN8" at 4690,4660 h60 r90
  text "IN7" at 4790,4660 h60 r90
  text "IN6" at 4890,4660 h60 r90
  text "IN5" at 4990,4660 h60 r90
  text "IN4" at 5090,4660 h60 r90
  text "IN3" at 5190,4660 h60 r90
  text "IN2" at 5290,4660 h60 r90
  text "IN1" at 5390,4660 h60 r90
  text "LOAD ON" at 1785,4610 h60
  text "VCHG" at 3315,4610 h60 r90
  text "VBATT" at 2940,4535 h60 r90
  text "VLOAD" at 3690,4535 h60 r90
  text "ACOKn" at 4090,4535 h60 r90
  text "CHGOKn" at 4190,4485 h60 r90
  text "CHGENn" at 4290,4485 h60 r90
  text "LOAD_ON" at 4380,4430 h60 r90
  text "Digital" at 3935,4354.99 h60
  text "Motor Control" at 4660,4350 h60
  text "Power to PCB1" at 2935,4285 h60
  text "From PCB1" at 3885,4260 h60
  text "From PCB1" at 4760,4260 h60
  text "OUT2" at 5400,4050 h60
  text "Load Switch" at 2010,4010 h60
  text "VBATT" at 1085,3985 h60
  text "OUT1" at 5395,3955 h60
  text "ACOKn" at 3485,3610 h60
  text "OUT4" at 5400,3500 h60
  text "OUT3" at 5400,3410 h60
  text "CHGOKn" at 3485,3135 h60
  text "Charger" at 1105,3059.99 h60
  text "IC" at 1230,2965 h60
  text "OUT6" at 5400,2960 h60
  text "OUT5" at 5400,2830 h60
  text "Receiving" at 3485,2754.99 h60
  text "Wireless" at 3485,2660 h60
  text "Power" at 3485,2560 h60
  text "OUT8" at 5380,2390 h60
  text "OUT7" at 5390,2280 h60
  text "CHG SELECTOR" at 3310,2035 h60
  text "Wired" at 4185,1760 h60
  text "Ryan Robinson" at 4560,1754.99 h60
  text "Input" at 4185,1654.99 h60
  text "Power Board" at 4560,1635 h60
  text "Wireless" at 1110,1535 h60
  text "Power Path," at 4560,1504.99 h60
  text "Receiver" at 1110,1435 h60
  text "Wireless/Wired IN," at 4560,1379.99 h60
  text "Charger IC," at 4560,1254.99 h60
  text "Motor Drivers" at 4560,1135 h60

## Text inside footprints (layer, text, board x,y; h text height)
U2: Mechanical 13 "*" at 4499,4070.5 h50
U3: Mechanical 13 "*" at 2387.72,2974.69 h50
U4: Mechanical 13 "*" at 4499,3495.5 h50
U5: Mechanical 13 "*" at 4499,2945.5 h50
U6: Mechanical 13 "*" at 4524,2395.5 h50